# Altium PCB Controller_MainBoard.PcbDoc
Units mil, origin at the board's own origin, x right, y up, seen from the top; angles counter-clockwise.
Board outline 3149.61 x 3149.61 mil, 2 copper layers (Top Layer, Bottom Layer); 391 components, 275 nets, 1158 pads, 0 vias.
Unrouted connection lines stored in the file: 769.
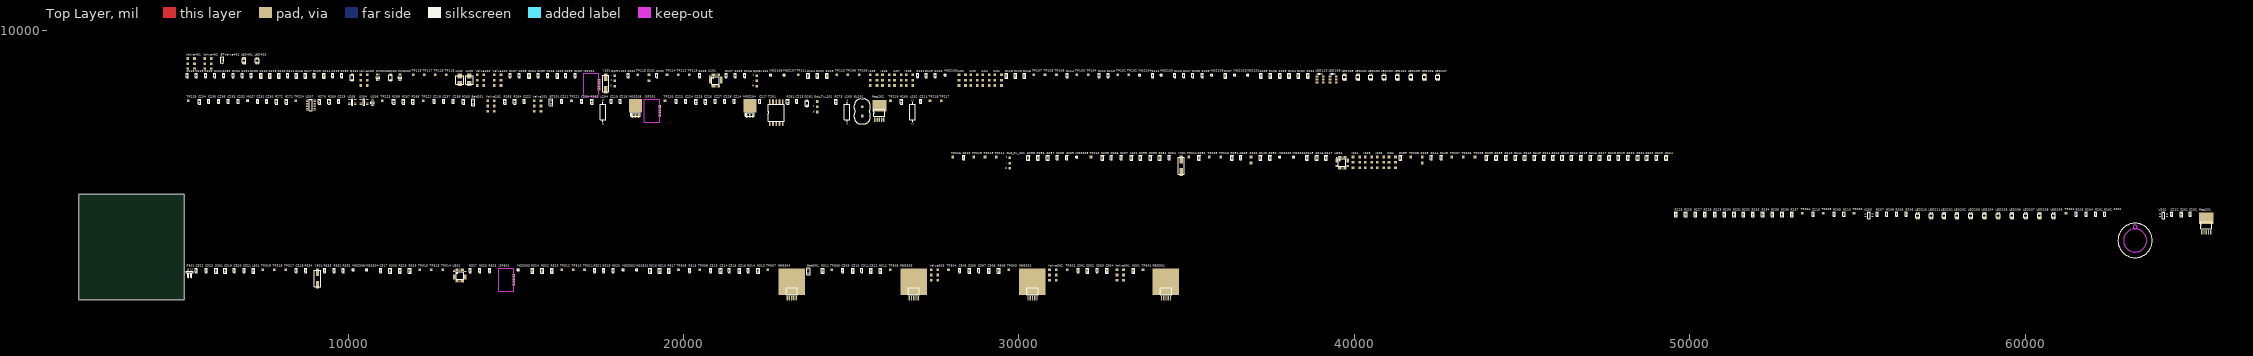
[diagram p0: Top Layer view]
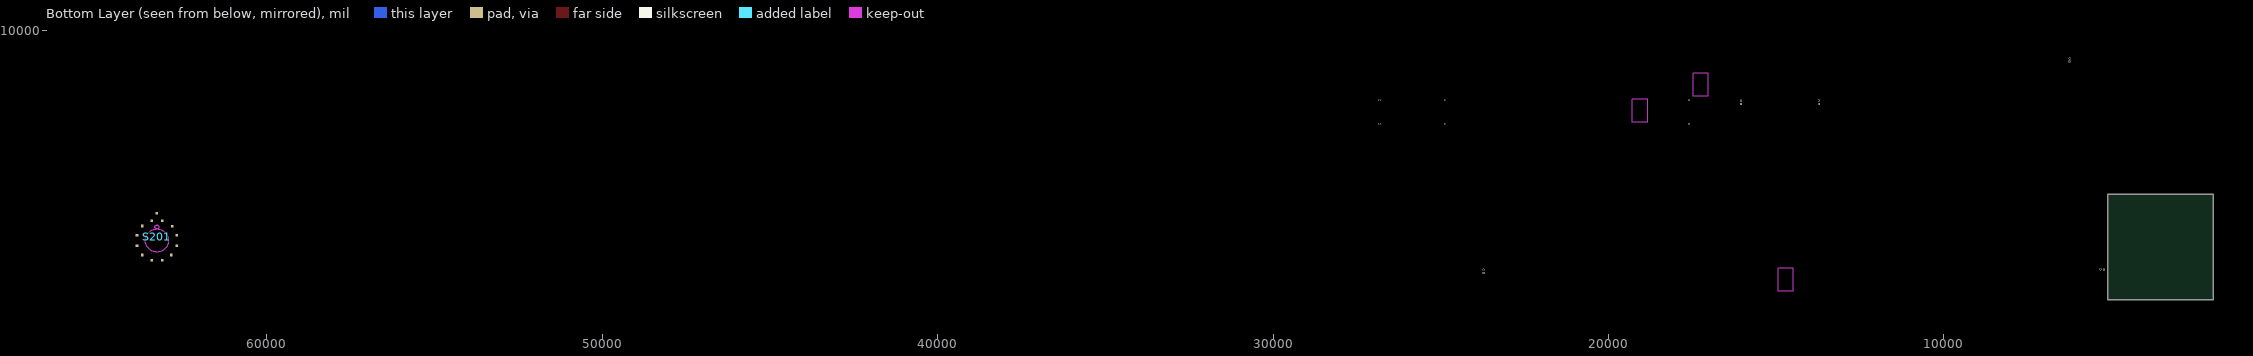
[diagram p1: Bottom Layer view, seen from below]

## Layer stack, top to bottom
Top Layer: signal copper 1.4
Dielectric: dielectric 12.6, FR-4, Dk 4.8
Bottom Layer: signal copper 1.4

## Board outline
1968.5,1968.5 5118.11,1968.5 5118.11,5118.11 1968.5,5118.11

## Design rules (kind name [scope] priority, off if disabled: settings)
Clearance [All] p1: gap=15
PlaneClearance [All] p1: clearance=30
PlaneConnect [All] p1: planeconnectstyle=Relief reliefexpansion=20 reliefentries=4 reliefconductorwidth=15 reliefairgap=15
PolygonConnect [All] p1: connectstyle=Relief reliefconductorwidth=15 reliefentries=4 polygonreliefangle="90 Angle"
RoomDefinition Valve [InComponentClass('Valve')] p1: confinementstyle=ConfineIn formatcopy=TRUE lockcomponents=FALSE outline 5160,8790 7570,8790 7570,9330 5160,9330
RoomDefinition Glasses [InComponentClass('Glasses')] p2: confinementstyle=ConfineIn formatcopy=TRUE lockcomponents=FALSE outline 5170,8020 42760,8020 42760,8850 5170,8850
RoomDefinition Controller [InComponentClass('Controller')] p3: confinementstyle=ConfineIn formatcopy=TRUE lockcomponents=FALSE outline 5170,3090 65640,3090 65640,8080 5170,8080
RoomDefinition Charger [InComponentClass('Charger')] p4: confinementstyle=ConfineIn formatcopy=TRUE lockcomponents=FALSE outline 5170,1930 34800,1930 34800,3040 5170,3040
RoutingCorners [All] p1: cornerstyle=Round minsetback=100 maxsetback=100
RoutingVias [All] p1: holewidth=28 width=50 viastyle="Through Hole" minholewidth=28 minwidth=50 maxholewidth=28 maxwidth=50
SilkscreenOverComponentPads [All] p1: minsilkscreentomaskgap=10
SolderMaskExpansion [All] p1: expansion=15
Width [All] p1: maxlimit=100 minlimit=10 preferedwidth=30
24 further rules are at their usual default settings.

## Classes and differential pairs
component class Charger: Batt301 C301 C302 C303 C304 C305 C306 C307 C308 C309 C310 C311 C312 C313 C314 C315 C316 C317 C318 C319 C320 C321 C322 C323 ISP301 L301 MOS301 MOS302 MOS303 MOS304 MOS305 P301 R301 R306 R311 R312 R313 R314 R315 R316 R317 R318 R319 R320 R321 R322 R323 R324 R325 R326 R327 R328 R329 R330 R331 R332 R333 R334 REG301 REG302 REG303 REG304 S301 TP301 TP302 TP303 TP304 TP305 TP306 TP307 TP308 TP309 TP310 TP311 TP312 TP313 TP314 TP315 TP316 TP317 TP318 U301 Valve301 Valve302 Valve303 Y301
component class Controller: Batt201 BT201 C201 C202 C203 C204 C205 C206 C207 C208 C209 C210 C211 C212 C213 C214 C215 C216 C217 C218 C219 C220 C221 C222 C223 C224 C225 C226 C227 C228 C229 C230 C231 C232 C233 C234 C235 C236 C237 C238 D201 EL201 I201 I202 I203 I204 ISP201 L201 L202 L203 L204 LED201 LED202 LED203 LED204 LED205 LED206 LED207 LED208 LED209 LED210 LED211 MOS201 MOS202 MOS203 MOS204 MOS205 MOS? Opt_Rx_201 Opt_Tx_201 R201 R202 R203 R204 R205 R206 R207 R208 R209 R210 R211 R212 R213 R214 R215 R216 R217 R218 R219 R220 R221 R222 R223 R224 R225 R226 R227 R228 R229 R230 R231 R232 R233 R234 R235 R236 R237 R238 R239 R240 R241 R242 R243 R244 R245 R246 R247 R248 R249 R250 R251 R252 R253 R254 R255 R256 R257 R258 R259 R260 R261 R262 R263 R264 R265 R266 R267 R268 R269 R270 R271 R272 R273 Reg201 Reg202 S201 S202 S203 T201 TP201 TP202 TP203 TP204 TP205 TP206 TP207 TP208 TP209 TP210 TP211 TP212 TP213 TP214 TP215 TP216 TP217 TP218 TP219 TP220 TP221 TP222 TP223 TP224 TP225 U201 U202 U203 U204 U205 U206 U207 Valve201 Valve202 Y201
component class Glasses: C101 C102 C103 C104 C105 C106 C107 C108 C109 C110 C111 C112 C113 C114 C115 C116 C117 C118 C119 C120 C121 D101 D102 I101 I102 I103 I104 I105 I106 I107 I108 ISP101 L101 L102 L103 LED101 LED102 LED103 LED104 LED105 LED106 LED107 LED108 LED109 LED110 MOS101 MOS102 MOS103 MOS104 MOS105 MOS106 MOS107 MOS108 OptRx101 OptTx101 PWR101 PWR102 R101 R102 R103 R104 R105 R106 R107 R108 R109 R110 R111 R112 R113 R114 R115 R116 R117 R118 R119 R120 R121 R122 R123 R124 R125 R126 R127 R128 R129 R130 R131 R132 R133 R134 S101 TP101 TP102 TP103 TP104 TP105 TP106 TP107 TP108 TP109 TP110 TP111 TP112 TP113 TP114 TP115 TP116 TP117 TP118 TP119 U101 Valve101 Valve102 Valve103 Y101
component class Valve: BTValve401 LED401 LED402 Valve401 Valve402

## Components (designator, comment, footprint, x,y, rotation, side; value= is the part's Value field where it differs from the comment)
Batt201 "BaseBankSocket" HDR1X2 13730,7810 r90 top
Batt301 "BaseBankSocket" HDR1X2 23730,2770 r90 top
BT201 "Battery" BAT-2 16050,7860 r90 top
BTValve401 "Battery" BAT-2 6250,9120 r90 top
C101 "18pf" 0603 18360,8660 r90 top
C102 "100nf" 0603 19210,8660 r90 top
C103 "18pf" 0603 16770,8660 r90 top
C104 "10uf" 0805 15400,8650 r90 top
C105 "1uf" 0603 15670,8660 r90 top
C106 "100nf" 0603 15950,8660 r90 top
C107 "100nf" 0603 14830,8660 r90 top
C108 "100nf" 0603 15110,8660 r90 top
C109 "100nf" 0603 16490,8660 r90 top
C110 "10uf" 0805 7940,8650 r90 top
C111 "1uf" 0603 8200,8660 r90 top
C112 "10uf" 0805 7400,8650 r90 top
C113 "10uf" 0805 7670,8650 r90 top
C114 "10uf" 0805 9280,8650 r90 top
C115 "1uf" 0603 9540,8660 r90 top
C116 "10uf" 0805 8460,8650 r90 top
C117 "10uf" 0805 8730,8650 r90 top
C118 "100nf" 0603 5210,8660 r90 top
C119 "2.2nf" 0603 5480,8660 r90 top
C120 "100nf" 0603 5750,8660 r90 top
C121 "2.2nf" 0603 6030,8660 r90 top
C201 "10uf" 0805 64660,4520 r90 top
C202 "1uf" 0603 64920,4530 r90 top
C203 "18pf" 0603 36610,6210 r90 top
C204 "18pf" 0603 34480,6210 r90 top
C205 "10uf" 0805 32490,6200 r90 top
C206 "1uf" 0603 32760,6210 r90 top
C207 "100nf" 0603 33050,6210 r90 top
C208 "100nf" 0603 31140,6210 r90 top
C209 "100nf" 0603 31430,6210 r90 top
C210 "100nf" 0603 28350,6210 r90 top
C211 "Cap Semi" 0603 27070,7890 r90 top
C212 "1uf" 0603 64370,4530 r90 top
C213 "10uf" 0603 23370,7890 r90 top
C214 "100nf" 0603 21520,7890 r90 top
C215 "1uf" 0603 53680,4530 r90 top
C216 "1uf" 0603 18120,7890 r90 top
C217 "1u" 0603 22280,7890 r90 top
C218 "10uf" 0603 12570,7890 r90 top
C219 "10uf" 0603 17840,7890 r90 top
C220 "Cap Semi" 0603 16970,7890 r90 top
C221 "1uf" 0603 16370,7890 r90 top
C222 "100nf" 0603 15250,7890 r90 top
C223 "100nf" 0603 19780,7890 r90 top
C224 "1uf" 0603 20070,7890 r90 top
C225 "10uf" 0805 20370,7880 r90 top
C226 "10uf" 0805 20660,7880 r90 top
C227 "1uf" 0603 20940,7890 r90 top
C228 "100nf" 0603 21230,7890 r90 top
C229 "Cap Semi" 0603 9720,7890 r90 top
C230 "Cap Semi" 0603 7570,7890 r90 top
C231 "Cap Semi" 0603 7300,7890 r90 top
C232 "Cap Semi" 0603 6720,7890 r90 top
C233 "Cap Semi" 0603 6430,7890 r90 top
C234 "10uf" 0805 5570,7880 r90 top
C235 "1uf" 0603 5850,7890 r90 top
C236 "100nf" 0603 6140,7890 r90 top
C237 "1uf" 0603 12850,7890 r90 top
C238 "100nf" 0603 13140,7890 r90 top
C301 "1uf" 0603 31770,2850 r90 top
C302 "10uf" 0805 32050,2840 r90 top
C303 "1uf" 0603 32330,2850 r90 top
C304 "10uf" 0805 32630,2840 r90 top
C305 "1uf" 0603 28230,2850 r90 top
C306 "10uf" 0805 28530,2840 r90 top
C307 "1uf" 0603 28810,2850 r90 top
C308 "10uf" 0805 29110,2840 r90 top
C309 "1uf" 0603 24750,2850 r90 top
C310 "10uf" 0805 25050,2840 r90 top
C311 "1uf" 0603 25320,2850 r90 top
C312 "10uf" 0805 25590,2840 r90 top
C313 "1uf" 0603 20810,2850 r90 top
C314 "10uf" 0805 21110,2840 r90 top
C315 "1uf" 0603 21370,2850 r90 top
C316 "10uf" 0805 21670,2840 r90 top
C317 "18pf" 0603 10970,2850 r90 top
C318 "18pf" 0603 8460,2850 r90 top
C319 "10uf" 0805 6340,2840 r90 top
C320 "1uf" 0603 6610,2850 r90 top
C321 "100nf" 0603 6900,2850 r90 top
C322 "100nf" 0603 5480,2850 r90 top
C323 "100nf" 0603 5770,2850 r90 top
D101 "Diode BYG20D" BYG20J-E3 10120,8520 r90 top
D102 "Diode BYG20D" BYG20J-E3 11270,8520 r90 top
D201 "Diode BYG20D" BYG20J-E3 23680,7750 r90 top
EL201 "EL Connector" "HV connector" 25330,7450 r90 top
I101 "LensesPCB" "Valve male" 29480,8520 r90 top
I102 "PowerSupplyPCB" "Valve male" 28410,8520 r90 top
I103 "PowerSupplyPCB" "Valve male" 28760,8520 r90 top
I104 "PowerSupplyPCB" "Valve male" 29120,8520 r90 top
I105 "LensesPCBA" "Valve male" 25770,8520 r90 top
I106 "PowerSupplyPCBB" "Valve male" 26130,8520 r90 top
I107 "PowerSupplyPCBB" "Valve male" 26490,8520 r90 top
I108 "PowerSupplyPCBB" "Valve male" 26840,8520 r90 top
I201 "HumanIOBoard" "Valve male" 41230,6070 r90 top
I202 "HumanIOBoard" "Valve male" 40880,6070 r90 top
I203 "HumanIOBoardA" "Valve male" 40520,6070 r90 top
I204 "HumanIOBoardA" "Valve male" 40160,6070 r90 top
ISP101 "SATA" SATA 17480,8380 r90 top
ISP201 "SATA" SATA 19290,7610 r90 top
ISP301 "SATA" SATA 14940,2570 r90 top
L101 "10uH" 0805 16240,8650 r90 top
L102 "ELL-6PG4R7N" ELL6PG4R7N-2CHK 13330,8530 r90 top
L103 "ELL-6PG4R7N" ELL6PG4R7N-2CHK 13620,8530 r90 top
L201 "10uH" 0805 33360,6200 r90 top
L202 "Inductor" AXIAL-0.7 26830,7570 r90 top
L203 "Inductor" AXIAL-0.7 24880,7570 r90 top
L204 "Inductor" AXIAL-0.7 17600,7570 r90 top
L301 "10uH" 0805 7180,2840 r90 top
LED101 "Tri LED" CLV1A-FKB 40110,8610 r90 top
LED102 "Tri LED" CLV1A-FKB 40490,8610 r90 top
LED103 "Tri LED" CLV1A-FKB 40890,8610 r90 top
LED104 "Tri LED" CLV1A-FKB 41290,8610 r90 top
LED105 "Tri LED" CLV1A-FKB 41690,8610 r90 top
LED106 "Tri LED" CLV1A-FKB 42090,8610 r90 top
LED107 "Tri LED" CLV1A-FKB 42490,8610 r90 top
LED108 "Tri LED" CLV1A-FKB 39710,8610 r90 top
LED109 "LED_head" "LED Headlamp" 39370,8540 r0 top
LED110 "LED_head" "LED Headlamp" 38980,8540 r0 top
LED201 "Tri LED" CLV1A-FKB 57580,4480 r90 top
LED202 "Tri LED" CLV1A-FKB 57970,4480 r90 top
LED203 "Tri LED" CLV1A-FKB 58380,4480 r90 top
LED204 "Tri LED" CLV1A-FKB 58790,4480 r90 top
LED205 "Tri LED" CLV1A-FKB 59200,4480 r90 top
LED206 "Tri LED" CLV1A-FKB 59610,4480 r90 top
LED207 "Tri LED" CLV1A-FKB 60020,4480 r90 top
LED208 "Tri LED" CLV1A-FKB 60430,4480 r90 top
LED209 "Tri LED" CLV1A-FKB 60850,4480 r90 top
LED210 "Tri LED" CLV1A-FKB 56800,4480 r90 top
LED211 "Tri LED" CLV1A-FKB 57200,4480 r90 top
LED401 "Tri LED" CLV1A-FKB 6900,9100 r90 top
LED402 "Tri LED" CLV1A-FKB 7290,9100 r90 top
MOS101 "EM6K7T2RCT-ND" EM6K7T2R-EMT6 36810,8650 r90 top
MOS102 "EM6K7T2RCT-ND" EM6K7T2R-EMT6 36410,8650 r90 top
MOS103 "EM6K7T2RCT-ND" EM6K7T2R-EMT6 34230,8650 r90 top
MOS104 "EM6K7T2RCT-ND" EM6K7T2R-EMT6 33580,8650 r90 top
MOS105 "EM6K7T2RCT-ND" EM6K7T2R-EMT6 27780,8650 r90 top
MOS106 "EM6K7T2RCT-ND" EM6K7T2R-EMT6 22580,8650 r90 top
MOS107 "EM6K7T2RCT-ND" EM6K7T2R-EMT6 22980,8650 r90 top
MOS108 "EM6K7T2RCT-ND" EM6K7T2R-EMT6 35730,8650 r90 top
MOS201 "EM6K7T2RCT-ND" EM6K7T2R-EMT6 38170,6200 r90 top
MOS202 "EM6K7T2RCT-ND" EM6K7T2R-EMT6 37760,6200 r90 top
MOS203 "EM6K7T2RCT-ND" EM6K7T2R-EMT6 31710,6200 r90 top
MOS204 "STD5NK52ZD" DPAK 21890,7460 r90 top
MOS205 "STD5NK52ZD" DPAK 18480,7460 r90 top
MOS301 "EM6K7T2RCT-ND" EM6K7T2R-EMT6 18590,2840 r90 top
MOS302 "EM6K7T2RCT-ND" EM6K7T2R-EMT6 18180,2840 r90 top
MOS303 "EM6K7T2RCT-ND" EM6K7T2R-EMT6 15060,2840 r90 top
MOS304 "EM6K7T2RCT-ND" EM6K7T2R-EMT6 10540,2840 r90 top
MOS305 "EM6K7T2RCT-ND" EM6K7T2R-EMT6 10130,2840 r90 top
MOS? "EM6K7T2RCT-ND" EM6K7T2R-EMT6 6990,7880 r90 top
Opt_Rx_201 "TORX177" "Optical RX" 29730,5890 r90 top
Opt_Tx_201 "LTDL-TX12P03" "Optical TX" 23990,7570 r90 top
OptRx101 "TORX177" "Optical RX" 22180,8340 r90 top
OptTx101 "LTDL-TX12P03" "Optical TX" 17950,8340 r90 top
P301 "Power in" HDR1X2H 5230,2880 r0 top
PWR101 "TPS61085PWR" TPS61085-MSOP8 10850,8520 r90 top
PWR102 "TPS61085PWR" TPS61085-MSOP8 11510,8520 r90 top
R101 "Res3" 0805 38620,8650 r90 top
R102 "Res3" 0805 38340,8650 r90 top
R103 "Res3" 0805 37780,8650 r90 top
R104 "Res3" 0805 38060,8650 r90 top
R105 "Res3" 0805 37220,8650 r90 top
R106 "Res3" 0805 37500,8650 r90 top
R107 "Res3" 0805 36160,8650 r90 top
R108 "10k" 0603 35190,8660 r90 top
R109 "10k" 0603 35470,8660 r90 top
R110 "10k" 0603 34650,8660 r90 top
R111 "10k" 0603 33990,8660 r90 top
R112 "10k" 0603 32390,8660 r90 top
R113 "10k" 0603 32660,8660 r90 top
R114 "10k" 0603 31440,8660 r90 top
R115 "Res3" 0805 29900,8650 r90 top
R116 "Res3" 0805 30170,8650 r90 top
R117 "10k" 0603 34920,8660 r90 top
R118 "Res3" 0805 29630,8650 r90 top
R119 "10k" 0603 27240,8660 r90 top
R120 "10k" 0603 27510,8660 r90 top
R121 "10k" 0603 26980,8660 r90 top
R122 "Res3" 0805 24000,8650 r90 top
R123 "Res3" 0805 24280,8650 r90 top
R124 "Res3" 0805 23720,8650 r90 top
R125 "10k" 0603 21550,8660 r90 top
R126 "10k" 0603 21830,8660 r90 top
R127 "10k" 0603 21270,8660 r90 top
R128 "10k" 0603 20480,8660 r90 top
R129 "54.9k" 0603 8990,8660 r90 top
R130 "54.9k" 0603 9810,8660 r90 top
R131 "22K" 0603 6850,8660 r90 top
R132 "18K" 0603 6290,8660 r90 top
R133 "22k" 0603 7110,8660 r90 top
R134 "18k" 0603 6570,8660 r90 top
R201 "10k" 0603 62110,4530 r90 top
R202 "10k" 0603 62380,4530 r90 top
R203 "10k" 0603 61530,4530 r90 top
R204 "10k" 0603 61820,4530 r90 top
R205 "10k" 0603 56170,4530 r90 top
R206 "10k" 0603 56460,4530 r90 top
R207 "10k" 0603 55590,4530 r90 top
R208 "10k" 0603 55880,4530 r90 top
R209 "10k" 0603 54310,4530 r90 top
R210 "10k" 0603 54600,4530 r90 top
R211 "Res1" 0805 45660,6200 r90 top
R212 "Res1" 0805 45920,6200 r90 top
R213 "Res1" 0805 46200,6200 r90 top
R214 "Res1" 0805 46480,6200 r90 top
R215 "Res1" 0805 46760,6200 r90 top
R216 "Res1" 0805 47040,6200 r90 top
R217 "Res1" 0805 47320,6200 r90 top
R218 "Res1" 0805 47600,6200 r90 top
R219 "Res1" 0805 47880,6200 r90 top
R220 "Res1" 0805 48160,6200 r90 top
R221 "Res1" 0805 48450,6200 r90 top
R222 "Res1" 0805 48720,6200 r90 top
R223 "Res1" 0805 49010,6200 r90 top
R224 "Res1" 0805 49300,6200 r90 top
R225 "Res1" 0805 49590,4520 r90 top
R226 "Res1" 0805 49880,4520 r90 top
R227 "Res1" 0805 50170,4520 r90 top
R228 "Res1" 0805 50460,4520 r90 top
R229 "Res1" 0805 50750,4520 r90 top
R230 "Res1" 0805 51040,4520 r90 top
R231 "Res1" 0805 51330,4520 r90 top
R232 "Res1" 0805 51600,4520 r90 top
R233 "Res1" 0805 51890,4520 r90 top
R234 "Res1" 0805 52180,4520 r90 top
R235 "Res1" 0805 52470,4520 r90 top
R236 "Res1" 0805 52760,4520 r90 top
R237 "Res1" 0805 53050,4520 r90 top
R238 "Res1" 0805 43940,6200 r90 top
R239 "Res1" 0805 44230,6200 r90 top
R240 "Res1" 0805 44520,6200 r90 top
R241 "Res1" 0805 44810,6200 r90 top
R242 "Res1" 0805 45080,6200 r90 top
R243 "Res1" 0805 45370,6200 r90 top
R244 "10k" 0603 42300,6210 r90 top
R245 "10k" 0603 42590,6210 r90 top
R246 "Res3" 0805 38880,6200 r90 top
R247 "Res3" 0805 39160,6200 r90 top
R248 "Res3" 0805 38590,6200 r90 top
R249 "Res3" 0805 37200,6200 r90 top
R250 "Res3" 0805 37490,6200 r90 top
R251 "Res3" 0805 36350,6200 r90 top
R252 "Res1" 0805 35370,6200 r90 top
R253 "Res3" 0805 33920,6200 r90 top
R254 "Res3" 0805 34200,6200 r90 top
R255 "Res3" 0805 33630,6200 r90 top
R256 "Res3" 0805 30570,6200 r90 top
R257 "Res3" 0805 30860,6200 r90 top
R258 "Res3" 0805 30280,6200 r90 top
R259 "Res1" 0805 41380,6200 r90 top
R260 "4R5" 0805 26500,7880 r90 top
R261 "Res3" 0805 23110,7880 r90 top
R262 "4R5" 0805 17270,7880 r90 top
R263 "Res3" 0805 14680,7880 r90 top
R264 "Res3" 0805 14970,7880 r90 top
R265 "Res3" 0805 13440,7880 r90 top
R266 "Res3" 0805 11940,7880 r90 top
R267 "Res3" 0805 11650,7880 r90 top
R268 "Res3" 0805 11360,7880 r90 top
R269 "Res3" 0805 9440,7880 r90 top
R270 "Res3" 0805 9150,7880 r90 top
R271 "Res3" 0805 8160,7880 r90 top
R272 "Res3" 0805 7870,7880 r90 top
R273 "4R5" 0805 24550,7880 r90 top
R301 "3R" 0805 33420,2840 r90 top
R306 "3R" 0805 29400,2840 r90 top
R311 "Res3" 0805 24150,2840 r90 top
R312 "3R" 0805 25870,2840 r90 top
R313 "Res3" 0805 22230,2840 r90 top
R314 "?" 0603 21930,2850 r90 top
R315 "3k3" 0603 20180,2850 r90 top
R316 "Res3" 0805 19290,2840 r90 top
R317 "Res3" 0805 19570,2840 r90 top
R318 "Res3" 0805 19010,2840 r90 top
R319 "10k" 0603 17620,2850 r90 top
R320 "10k" 0603 17900,2850 r90 top
R321 "10k" 0603 17350,2850 r90 top
R322 "Res3" 0805 15790,2840 r90 top
R323 "Res3" 0805 16080,2840 r90 top
R324 "Res3" 0805 15500,2840 r90 top
R325 "10k" 0603 13930,2850 r90 top
R326 "10k" 0603 14220,2850 r90 top
R327 "10k" 0603 13640,2850 r90 top
R328 "Res3" 0805 11550,2840 r90 top
R329 "Res3" 0805 11840,2840 r90 top
R330 "Res3" 0805 11260,2840 r90 top
R331 "10k" 0603 9590,2850 r90 top
R332 "10k" 0603 9860,2850 r90 top
R333 "10k" 0603 9300,2850 r90 top
R334 "10k" 0603 8740,2850 r90 top
Reg201 "Reg104-5" REG104-5-DDPAK5 65400,4190 r90 top
Reg202 "Reg104-5" REG104-5-DDPAK5 25840,7550 r90 top
REG301 "TPS7A4501DCQR" TPS7A4501KTTR-5DDPAK 34250,2020 r90 top
REG302 "TPS7A4501DCQR" TPS7A4501KTTR-5DDPAK 30270,2020 r90 top
REG303 "TPS7A4501DCQR" TPS7A4501KTTR-5DDPAK 26730,2020 r90 top
REG304 "TPS7A4501KTTR" TPS7A4501KTTR-5DDPAK 23090,2020 r90 top
S101 "SW-PB" "2 pin switch (surface mount)" 18970,8500 r90 top
S201 "SW-12WAY" "12 pole switch" 63280,3740 r0 top
S202 "SW-KEY" "2 pin switch (surface mount)" 36920,6050 r90 top
S203 "SW-SPST" "2 pin switch (surface mount)" 42030,6050 r90 top
S301 "SW-PB" 0805 6070,2840 r90 top
T201 "SI3210 SMD Transformer" "SI3210 SMD Transformer" 22570,7230 r90 top
TP101 "TestPoint" TestPoint 32950,8680 r90 top
TP102 "TestPoint" TestPoint 33270,8680 r90 top
TP103 "TestPoint" TestPoint 31730,8680 r90 top
TP104 "TestPoint" TestPoint 32070,8680 r90 top
TP105 "TestPoint" TestPoint 30780,8680 r90 top
TP106 "TestPoint" TestPoint 31120,8680 r90 top
TP107 "TestPoint" TestPoint 30440,8680 r90 top
TP108 "TestPoint" TestPoint 24900,8680 r90 top
TP109 "TestPoint" TestPoint 25240,8680 r90 top
TP110 "TestPoint" TestPoint 24570,8680 r90 top
TP111 "TestPoint" TestPoint 23420,8680 r90 top
TP112 "TestPoint" TestPoint 19840,8680 r90 top
TP113 "TestPoint" TestPoint 20170,8680 r90 top
TP114 "TestPoint" TestPoint 19510,8680 r90 top
TP115 "TestPoint" TestPoint 18640,8680 r90 top
TP116 "TestPoint" TestPoint 12930,8680 r90 top
TP117 "TestPoint" TestPoint 12270,8680 r90 top
TP118 "TestPoint" TestPoint 12600,8680 r90 top
TP119 "TestPoint" TestPoint 11940,8680 r90 top
TP201 "TestPoint" TestPoint 61220,4550 r90 top
TP202 "TestPoint" TestPoint 54900,4550 r90 top
TP203 "TestPoint" TestPoint 53980,4550 r90 top
TP204 "TestPoint" TestPoint 53350,4550 r90 top
TP205 "TestPoint" TestPoint 43600,6230 r90 top
TP206 "TestPoint" TestPoint 43250,6230 r90 top
TP207 "TestPoint" TestPoint 42900,6230 r90 top
TP208 "TestPoint" TestPoint 41680,6230 r90 top
TP209 "TestPoint" TestPoint 35670,6230 r90 top
TP210 "TestPoint" TestPoint 36020,6230 r90 top
TP211 "TestPoint" TestPoint 35060,6230 r90 top
TP212 "TestPoint" TestPoint 32150,6230 r90 top
TP213 "TestPoint" TestPoint 28990,6230 r90 top
TP214 "TestPoint" TestPoint 29330,6230 r90 top
TP215 "TestPoint" TestPoint 28650,6230 r90 top
TP216 "TestPoint" TestPoint 28030,6230 r90 top
TP217 "TestPoint" TestPoint 27690,7910 r90 top
TP218 "TestPoint" TestPoint 27350,7910 r90 top
TP219 "TestPoint" TestPoint 26170,7910 r90 top
TP220 "TestPoint" TestPoint 19450,7910 r90 top
TP221 "TestPoint" TestPoint 16660,7910 r90 top
TP222 "TestPoint" TestPoint 12240,7910 r90 top
TP223 "TestPoint" TestPoint 11020,7910 r90 top
TP224 "TestPoint" TestPoint 8440,7910 r90 top
TP225 "TestPoint" TestPoint 5230,7910 r90 top
TP301 "TestPoint" TestPoint 33700,2870 r90 top
TP302 "TestPoint" TestPoint 31440,2870 r90 top
TP303 "TestPoint" TestPoint 29700,2870 r90 top
TP304 "TestPoint" TestPoint 27900,2870 r90 top
TP305 "TestPoint" TestPoint 26160,2870 r90 top
TP306 "TestPoint" TestPoint 24420,2870 r90 top
TP307 "TestPoint" TestPoint 22510,2870 r90 top
TP308 "TestPoint" TestPoint 20480,2870 r90 top
TP309 "TestPoint" TestPoint 19850,2870 r90 top
TP310 "TestPoint" TestPoint 16710,2870 r90 top
TP311 "TestPoint" TestPoint 17050,2870 r90 top
TP312 "TestPoint" TestPoint 16370,2870 r90 top
TP313 "TestPoint" TestPoint 12480,2870 r90 top
TP314 "TestPoint" TestPoint 12820,2870 r90 top
TP315 "TestPoint" TestPoint 12140,2870 r90 top
TP316 "TestPoint" TestPoint 7800,2870 r90 top
TP317 "TestPoint" TestPoint 8140,2870 r90 top
TP318 "TestPoint" TestPoint 7460,2870 r90 top
U101 "ATmega8L-8AI" 32A_M 20960,8510 r0 top
U201 "ATmega8L-8AI" 32A_M 39640,6060 r0 top
U202 "FSAL200" FSAL200-16QSOP 64020,4580 r0 top
U203 "FSAL200" FSAL200-16QSOP 55240,4580 r0 top
U204 "NE555" NE555 10380,7940 r0 top
U205 "NE555" NE555 10030,7940 r0 top
U206 "MCP1630v" "MCP1630V-E/MS 8MSOP" 10690,7760 r90 top
U207 "74AC04SC" "74AC04SC 14-SOIC" 8780,7930 r0 top
U301 "ATmega8L-8AI" 32A_M 13330,2700 r0 top
Valve101 "6 + SHIELD DIN" "Valve male" 14560,8520 r90 top
Valve102 "6 + SHIELD DIN" "Valve male" 14050,8520 r90 top
Valve103 "6+SHIELD DIN" "Valve male" 10570,8520 r90 top
Valve201 "6+SHIELD DIN" "Valve male" 15750,7750 r90 top
Valve202 "6+SHIELD DIN" "Valve male" 14360,7750 r90 top
Valve301 "6+SHIELD DIN" "Valve male" 33120,2710 r90 top
Valve302 "6+SHIELD DIN" "Valve male" 31110,2710 r90 top
Valve303 "6+SHIELD DIN" "Valve male" 27580,2710 r90 top
Valve401 "6+SHIELD DIN SKT" "Valve male" 5420,9010 r90 top
Valve402 "6+SHIELD DIN SKT" "Valve male" 5920,9010 r90 top
Y101 "XTAL" ABLS-16MHz-B4-T 17680,8420 r90 top
Y201 "XTAL" ABLS-16MHz-B4-T 34840,5970 r90 top
Y301 "XTAL" ABLS-16MHz-B4-T 9090,2610 r90 top

## Footprints (in the part's own frame and the unit in brackets; to place one, negate y for a bottom-side part, rotate by r counter-clockwise, add the part's x,y. Pads: shape width x height; smd on the part's side, far side on the other; paste and mask are expansions set on the pad)
"2 pin switch (surface mount)" [mm]
  rect 2x2 smd: 1(0,0) 2(4.6,0)
"12 pole switch" [mm] "rotary switch"
  rect 2x2 smd far side: 1(-4,15) 2(-11.6,10.8) 3(-15,4) 5(-15,-4) 6(-11,-11) 7(-4,-15) 8(4,-15) 9(11,-11) 10(15,-4) 11(15,4) 12(11,11) 13(4,15) 14(0,20.6)
  Keep-Out Layer circle w0.254: c0,0 r8.75
  Keep-Out Layer circle w0.254: c0,10.25 r1.5
  silkscreen extent -13,-13 13,13
32A_M [mm] "Thin QFP, 32-Leads, Body 7x7mm, Pitch 0.8mm, IPC Low Density"
  oval 1.95x0.6 smd: 1(-4.25,2.8) 2(-4.25,2) 3(-4.25,1.2) 4(-4.25,0.4) 5(-4.25,-0.4) 6(-4.25,-1.2) 7(-4.25,-2) 8(-4.25,-2.8) 17(4.25,-2.8) 18(4.25,-2) 19(4.25,-1.2) 20(4.25,-0.4) 21(4.25,0.4) 22(4.25,1.2) 23(4.25,2) 24(4.25,2.8)
  oval 0.6x1.95 smd: 9(-2.8,-4.25) 10(-2,-4.25) 11(-1.2,-4.25) 12(-0.4,-4.25) 13(0.4,-4.25) 14(1.2,-4.25) 15(2,-4.25) 16(2.8,-4.25) 25(2.8,4.25) 26(2,4.25) 27(1.2,4.25) 28(0.4,4.25) 29(-0.4,4.25) 30(-1.2,4.25) 31(-2,4.25) 32(-2.8,4.25)
  silkscreen extent -4.37,-2.85 2.85,3.77, body extent -3.5,-3.5 3.5,3.5, height 1.2
"74AC04SC 14-SOIC" [mm]
  rect 1.7x0.75 smd: 1(0,0)
  oval 1.7x0.75 smd: 2(0,-1.27) 3(0,-2.54) 4(0,-3.81) 5(0,-5.08) 6(0,-6.35) 7(0,-7.62) 8(5.7,-7.62) 9(5.7,-6.35) 10(5.7,-5.08) 11(5.7,-3.81) 12(5.7,-2.54) 13(5.7,-1.27) 14(5.7,0)
  silkscreen extent 1.68,-8.25 4.02,0.64
0603 [mm] "generic 0603 Cap/Res"
  rect 1.1x1 smd: 1(-0.85,0) 2(0.85,0)
  silkscreen extent -1.65,-0.76 1.65,0.76
0805 [mm] "generic 0805 Cap/Res"
  rect 1.3x1.5 smd: 1(-0.95,0) 2(0.95,0)
  silkscreen extent -1.91,-1.02 1.91,1.02
ABLS-16MHz-B4-T [mm] "Abracon ABLS Series 16MHz 18pF Crystal"
  rect 5.8x2.5 smd: 1(-4.75,0) 2(4.75,0)
  silkscreen extent -6.35,-2.35 6.35,2.35
AXIAL-0.7 [mm] "Axial Device, Thru-Hole; 2 Leads; 0.7 in Pin Spacing"
  round 1.4 hole 0.85: 1(-8.89,0) 2(8.89,0)
  silkscreen extent -7.62,-2.03 7.62,2.03
BAT-2 [mm] "Multicell Battery; 2 Leads"
  rect 1.5x1.5 hole 0.9: 1(-1.27,0)
  round 1.5 hole 0.9: 2(1.27,0)
  silkscreen extent -2.54,-1.27 2.54,1.27
BYG20J-E3 [mm]
  rrect50% 2x2 smd: 1(0,0)
  rect 2x2 smd: 2(4,0)
  silkscreen extent -0.04,-1.25 4,1.6
CLV1A-FKB [mm] "Cree RGB SMD LED"
  rrect50% 2x1.3 smd: 1(-1.75,0.75)
  rect 2x1.3 smd: 2(-1.75,-0.75) 3(1.75,-0.75) 4(1.75,0.75)
  silkscreen extent -1.6,-1.4 1.6,1.4
DPAK [mm]
  rect 3.2x1.2 smd: 1(0,0)
  rect 10x10 smd: 1(7.5,-2.28)
  oval 3.2x1.2 smd: 2(0,-2.28) 3(0,-4.56)
  silkscreen extent -0.43,-5.7 2.43,1.14
ELL6PG4R7N-2CHK [mm] "Panasonic ELL-6UH100M Inductor 10uH"
  rect 3.8x3.4 smd: 1(-2.85,0) 2(2.85,0)
  silkscreen extent -3.2,-3 3.2,3
EM6K7T2R-EMT6 [mm] "Rohm Dual Channel NMOS"
  rect 0.8x0.25 smd: 1(0,0)
  oval 0.8x0.25 smd: 2(0,-0.5) 3(0,-1) 4(1.4,-1) 5(1.4,-0.5) 6(1.4,0)
  silkscreen extent 0.12,-1.25 1.28,0.25
FSAL200-16QSOP [mm]
  rect 1.7x0.317 smd: 1(0,0)
  oval 1.7x0.317 smd: 2(0,-0.635) 3(0,-1.27) 4(0,-1.905) 5(0,-2.54) 6(0,-3.175) 7(0,-3.81) 8(0,-4.445) 9(5.4,-4.445) 10(5.4,-3.81) 11(5.4,-3.175) 12(5.4,-2.54) 13(5.4,-1.905) 14(5.4,-1.27) 15(5.4,-0.635) 16(5.4,0)
  silkscreen extent 1.73,-4.76 3.67,0.32
HDR1X2 [mm] "Connector; Header; 2 Position"
  rect 1.5x1.5 hole 0.9: 1(0,0)
  round 1.5 hole 0.9: 2(2.54,0)
  silkscreen extent -1.27,-1.27 3.81,1.27
HDR1X2H [mm] "Connector; Header; 2 Position; Right Angle"
  rect 1.5x1.5 hole 0.9: 1(0,0)
  round 1.5 hole 0.9: 2(2.54,0)
  silkscreen extent -1.27,-6.35 3.81,-1.27
"HV connector" [mm]
  rect 2x2 smd: 1(0,0) 2(7,0)
  silkscreen extent -6,-6 13,6
"LED Headlamp" [mm]
  rect 2x1.5 smd: 1(-2.35,-2.1) 1(-2.35,0) 1(-2.35,2.1) 2(2.35,-2.1) 2(2.35,0) 2(2.35,2.1)
  silkscreen extent -2.67,3.68 1.65,4.83
"MCP1630V-E/MS 8MSOP" [mm]
  rect 0.8x0.4 smd: 1(0,0)
  oval 0.8x0.4 smd: 2(0,-0.65) 3(0,-1.3) 4(0,-1.95) 5(4.3,-1.95) 6(4.3,-1.3) 7(4.3,-0.65) 8(4.3,0)
  silkscreen extent 1.29,-2.28 3.01,0.33
NE555 [mm]
  rect 2x0.55 smd: 1(0,0)
  oval 2x0.55 smd: 2(0,-1.27) 3(0,-2.54) 4(0,-3.81) 5(4.8,-3.81) 6(4.8,-2.54) 7(4.8,-1.27) 8(4.8,0)
  silkscreen extent 1.84,-4.44 2.97,0.64
"Optical RX" [mm]
  rect 2x2 smd: 1(0,0) 2(4,0) 3(8,0)
"Optical TX" [mm]
  rect 2x2 smd: 1(0,0) 2(4,0) 3(8,0)
REG104-5-DDPAK5 [mm]
  rect 3.4x1 smd: 1(-5.3,3.4)
  oval 3.4x1 smd: 2(-5.3,1.7) 3(-5.3,0) 4(-5.3,-1.7) 5(-5.3,-3.4)
  rect 8.6x10.7 smd: 6(5.3,0)
  silkscreen extent -2.72,-4.25 2.72,4.25
SATA [mm]
  round 0 hole 1.524 unplated: 0(-6.375,2.362) 0(6.375,2.362)
  rect 0.9x2 smd: 1(3.81,0) 2(2.54,0) 3(1.27,0) 4(0,0) 5(-1.27,0) 6(-2.54,0) 7(-3.81,0)
  Keep-Out Layer lines w0.254: -8.8,11.5 -8.8,0.1 ; -8.75,11.5 8.75,11.5 ; 8.8,11.5 8.8,0.1 ; -8.75,0.1 8.75,0.1
"SI3210 SMD Transformer" [mm]
  oval 4x1.2 smd: 0(0,-2.48) 0(0,-4.96) 0(0,-7.44) 2(0,-9.92) 3(16.36,0) 4(16.36,-2.48) 5(16.36,-4.96) 6(16.36,-7.44) 7(16.36,-9.92)
  rect 4x1.2 smd: 1(0,0)
  silkscreen extent 1.84,-11.16 14.53,1.24
TestPoint [mm]
  rect 2x2 smd: 1(0,0)
TPS7A4501KTTR-5DDPAK [mm]
  rect 3.4x1 smd: 1(0,0)
  oval 3.4x1 smd: 2(0,-1.7) 3(0,-3.4) 4(0,-5.1) 5(0,-6.8)
  rect 20x20 smd: 6(12.6,-3.4)
  silkscreen extent 2.53,-7.65 8.07,0.85
TPS61085-MSOP8 [mm] "Ti Step-Up DCDC Converter - MSOP 8 Pin Package"
  rect 1.4x0.38 smd: 1(0,0)
  oval 1.4x0.38 smd: 2(0,-0.65) 3(0,-1.3) 4(0,-1.95) 5(4.35,-1.95) 6(4.35,-1.3) 7(4.35,-0.65) 8(4.35,0)
  silkscreen extent 1.58,-2.28 2.77,0.33
"Valve male" [mm]
  rect 2x2 smd: 1(-4,5) 2(-4,0) 3(0,5) 4(0,0) 5(4,5) 6(4,0)

## Part data
Batt201 Batt301 EL201: library part "Header 2", "Header, 2-Pin"
BT201 BTValve401: "Multicell Battery"
C101 C102 C103 C104 C105 C106 C107 C108 C109 C110 C111 C112 C113 C114 C115 C116 C117 C118 C119 C120 C121 C201 C202 C203 C204 C205 C206 C207 C208 C209 C210 C212 C213 C214 C215 C216 C217 C218 C219 C221 C222 C223 C224 C225 C226 C227 C228 C234 C235 C236 C237 C238 C301 C302 C303 C304 C305 C306 C307 C308 C309 C310 C311 C312 C313 C314 C315 C316 C317 C318 C319 C320 C321 C322 C323: library part "Cap Semi", "Capacitor (Semiconductor SIM Model)"
C211 C220 C229 C230 C231 C232 C233: "Capacitor (Semiconductor SIM Model)"
D101 D102 D201: library part "Diode 10TQ035", "Schottky Rectifier"
I101 I102 I103 I104 I105 I106 I107 I108 I201 I202 I203 I204 Valve101 Valve102 Valve103 Valve201 Valve202 Valve301 Valve302 Valve303 Valve401 Valve402: library part "Header 3X2A", "Header, 3-Pin, Dual row"
ISP101 ISP201 ISP301: library part "Header 3X2", "Header, 3-Pin, Dual row"
L101 L102 L103 L201 L301: library part Inductor, "Inductor"
LED109 LED110: library part LED0, "Typical INFRARED GaAs LED"
MOS204 MOS205: library part MOSFET-N, "N-Channel MOSFET"
Opt_Rx_201 OptRx101: "Optical receiver module"
Opt_Tx_201 OptTx101: "Optical transmitter"
P301: library part "Header 2H", "Header, 2-Pin, Right Angle"
R101 R102 R103 R104 R105 R106 R107 R115 R116 R118 R122 R123 R124 R211 R212 R213 R214 R215 R216 R217 R218 R219 R220 R221 R222 R223 R224 R225 R226 R227 R228 R229 R230 R231 R232 R233 R234 R235 R236 R237 R238 R239 R240 R241 R242 R243 R246 R247 R248 R249 R250 R251 R252 R253 R254 R255 R256 R257 R258 R259 R261 R263 R264 R265 R266 R267 R268 R269 R270 R271 R272 R311 R313 R316 R317 R318 R322 R323 R324 R328 R329 R330: "Resistor"
R108 R109 R110 R111 R112 R113 R114 R117 R119 R120 R121 R125 R126 R127 R128 R201 R202 R203 R204 R205 R206 R207 R208 R209 R210 R244 R245 R260 R262 R273 R315 R319 R320 R321 R325 R326 R327 R331 R332 R333 R334: library part Res3, "Resistor"
R129 R130 R131 R132 R133 R134 R301 R306 R312 R314: library part Res1, "Resistor"
REG301 REG302 REG303: library part TPS7A4515
REG304: library part TPS7A4501
S101 S301: "Switch"
S201: "12 Way Switch"
S202: library part SW-SPST, "Single-Pole, Single-Throw Switch"
S203: "Single-Pole, Single-Throw Switch"
U101 U201 U301: "8-Bit AVR Microcontroller with 8K Bytes of In-System Programmable Flash Memory"
U202 U203: "ST Quad Bi-Directional Logic Switch"
U207: library part SN54HC04J, "Hex Inverter"
Y101 Y201 Y301: "Crystal Oscillator"

## Nets (pads, with @x,y where several pads share a name; then routed paths per layer and width w, separated by ;. In a path a pad name is that pad's centre, name@x,y a point inside that pad or via, vN(x,y) a via of type N, cw(c..) or ccw(c..) an arc to the next point about the centre after c; other vN are vias at no path point)
555OSC_201: R269.1 TP224.1 U204.3 U207.1
ACOSC_201: R262.2 R270.1 TP219.1 U205.3
B_CONTROL_101: LED101.1 LED102.1 LED103.1 LED104.1 LED105.1 LED106.1 LED107.1 LED108.1 R104.1
B_PWM_101: I101.3 U101.2
B_PWM_101A: I105.3 MOS101.5 R109.2 TP102.1
BATT+301: Batt301.1 C315.2 C316.2 R311.2 R314.1 REG304.4 TP307.1
BATTEN301: REG304.1 TP309.1 U301.26
BATTERY_SENSE_201: Batt201.1 BT201.1 C223.2 C224.2 C225.2 I202.3 Reg202.1 Reg202.5 TP221.1 U201.19
BATTERYSENSE_101: I102.1 U101.19
BATTERYSENSE_101B: I106.1
BATTSENSE301: R311.1 R313.2 TP308.1 U301.22
COLOUR_EN_201: I202.4 U201.14
COLOUR_EN_201A: I204.4 Reg201.5 TP202.1
DATA201: I202.6 U201.25
DATA201A: I204.6 TP204.1 U203.4
DATA202: I201.2 U201.26
DATA202A: I203.2 TP206.1 U203.7
DATA203: I201.4 U201.27
DATA203A: I203.4 TP207.1 U203.9
DATA204: I201.5 U201.28
DATA204A: TP208.1 U203.12
DATA_SELECT_201: I202.1 U201.23
DATA_SELECT_201A: I204.1 TP201.1 U202.1
DATA_SELECT_202: I202.5 U201.24
DATA_SELECT_202A: I204.5 TP203.1 U203.1
EL_CONTROL_201: MOS?.2 TP225.1 U201.13
G_CONTROL_101: LED101.2 LED102.2 LED103.2 LED104.2 LED105.2 LED106.2 LED107.2 LED108.2 R103.1
G_PWM_101: I101.2 U101.1
G_PWM_101A: I105.2 MOS101.2 R108.2 TP101.1
GND101: C101.1 C102.1 C103.1 C104.1 C105.1 C106.1 C107.1 C108.1 C109.1 I101.5 I102.5 ISP101.6 MOS103.3 MOS103.6 MOS104.3 MOS104.6 MOS105.3 MOS105.6 MOS106.3 MOS106.6 MOS107.3 OptRx101.2 OptTx101.3 R112.1 R113.1 R114.1 R119.1 R120.1 R121.1 R125.1 R126.1 R127.1 S101.2 U101.3 U101.5 U101.21
GND101A: I105.5 MOS101.3 MOS101.6 MOS102.3 MOS102.6 MOS108.3 R108.1 R109.1 R110.1 R111.1 R117.2
GND101B: C110.1 C111.1 C112.1 C113.1 C114.1 C115.1 C116.1 C117.1 C118.1 C119.1 C120.1 C121.1 I106.5 PWR101.4 PWR102.4 R132.1 R134.1 Valve103.2
GND201: Batt201.2 BT201.2 C203.1 C204.1 C205.1 C206.1 C207.1 C208.1 C209.1 C210.1 C213.1 C214.1 C216.1 C218.2 C219.2 C220.1 C221.2 C222.2 C223.1 C224.1 C225.1 C226.1 C227.1 C228.1 C230.1 C231.1 C232.1 C233.1 C234.2 C235.2 C236.2 C237.2 C238.2 I201.3 ISP201.6 MOS201.3 MOS201.6 MOS202.3 MOS202.6 MOS203.3 MOS203.6 MOS205.3 MOS?.3 Opt_Rx_201.2 Opt_Tx_201.3 R249.1 R250.1 R251.1 R252.2 R256.1 R257.1 R258.1 R261.2 R263.1 R265.2 Reg202.3 T201.6 U201.3 U201.5 U201.21 U204.1 U205.1 U206.5 U207.7
GND201A: C201.1 C202.1 C212.2 C215.1 I203.3 I203.5 R201.2 R202.1 R203.2 R204.1 R205.2 R206.1 R207.2 R208.1 R209.2 R210.1 R211.1 R212.1 R213.1 R214.1 R215.1 R216.1 R217.1 R218.1 R219.1 R220.1 R221.1 R222.1 R223.1 R224.1 R225.1 R226.1 R227.1 R228.1 R229.1 R230.1 R231.1 R232.1 R233.1 R234.1 R235.1 R236.1 R237.1 R238.1 R239.1 R240.1 R241.1 R242.1 R243.1 R244.1 R245.2 R259.2 Reg201.3 U202.8 U202.15 U203.8 U203.15
GND301: Batt301.2 C301.1 C302.1 C303.1 C304.1 C305.1 C306.1 C307.1 C308.1 C309.1 C310.1 C311.1 C312.1 C313.1 C314.1 C315.1 C316.1 C317.1 C318.1 C319.1 C320.1 C321.1 C322.1 C323.1 ISP301.6 MOS301.3 MOS301.6 MOS302.3 MOS302.6 MOS303.3 MOS303.6 MOS304.3 MOS304.6 MOS305.3 P301.2 R313.1 R315.1 R319.1 R320.1 R321.1 R325.1 R326.1 R327.1 R331.1 R332.1 R333.1 REG301.3 REG301.6 REG302.3 REG302.6 REG303.3 REG303.6 REG304.3 REG304.6 S301.2 U301.3 U301.5 U301.21 Valve301.2 Valve302.2 Valve303.2
HEADLIGHT_201: I202.2 U201.22
HEADLIGHT_201A: I204.2 R259.1 S203.2 TP205.1
HEADLIGHTENABLE_101: I101.4 U101.12
HEADLIGHTENABLE_101A: I105.4 MOS108.2 R111.2 TP104.1
HVDC_201: C213.2 C216.2 C220.2 D201.1 R264.2 R273.1 TP217.1
ISENSE_201: MOS204.3 R261.1 TP220.1 U206.3
KEY_201: R252.1 S202.2 U201.12
MISO101: ISP101.1 U101.16
MISO201: ISP201.1 U201.16
MISO301: ISP301.1 U301.16
MOSI101: ISP101.4 U101.15
MOSI201: ISP201.4 U201.15
MOSI301: ISP301.4 U301.15
NetBTValve401_1: BTValve401.1 Valve401.1
NetBTValve401_2: BTValve401.2 Valve401.2
NetC107_2: C107.2 U101.20
NetC118_2: C118.2 PWR101.8
NetC119_2: C119.2 R131.1
NetC120_2: C120.2 PWR102.8
NetC121_2: C121.2 R133.1
NetC201_2: C201.2 C202.2 Reg201.2
NetC208_2: C208.2 U201.20
NetC211_1: C211.1 T201.3
NetC211_2: C211.2 MOS204.1 T201.1
NetC217_1: C217.1 EL201.2 MOS205.1
NetC217_2: C217.2 L203.1 R273.2
NetC229_1: C229.1 U206.1
NetC230_2: C230.2 U204.5
NetC231_2: C231.2 U205.5
NetC232_2: C232.2 R271.2 U204.2 U204.6
NetC233_2: C233.2 R272.2 U205.2 U205.6
NetC322_2: C322.2 U301.20
NetD101_3: L102.2 PWR101.5
NetD102_3: L103.2 PWR102.5
NetEL201_1: EL201.1 L203.2
NetL101_1: L101.1 U101.18
NetL201_1: L201.1 U201.18
NetL202_1: L202.1 R260.1
NetL202_2: L202.2 MOS204.2 TP216.1
NetL204_1: L204.1 R262.1
NetL204_2: L204.2 MOS205.2
NetL301_1: L301.1 U301.18
NetLED109_2: LED109.2 LED110.2 R102.2
NetLED201_1: LED201.1 R211.2
NetLED201_2: LED201.2 R212.2
NetLED201_3: LED201.3 R213.2
NetLED202_1: LED202.1 R214.2
NetLED202_2: LED202.2 R215.2
NetLED202_3: LED202.3 R216.2
NetLED203_1: LED203.1 R217.2
NetLED203_2: LED203.2 R218.2
NetLED203_3: LED203.3 R219.2
NetLED204_1: LED204.1 R220.2
NetLED204_2: LED204.2 R221.2
NetLED204_3: LED204.3 R222.2
NetLED205_1: LED205.1 R223.2
NetLED205_2: LED205.2 R224.2
NetLED205_3: LED205.3 R225.2
NetLED206_1: LED206.1 R226.2
NetLED206_2: LED206.2 R227.2
NetLED206_3: LED206.3 R228.2
NetLED207_1: LED207.1 R229.2
NetLED207_2: LED207.2 R230.2
NetLED207_3: LED207.3 R231.2
NetLED208_1: LED208.1 R232.2
NetLED208_2: LED208.2 R233.2
NetLED208_3: LED208.3 R234.2
NetLED209_1: LED209.1 R235.2
NetLED209_2: LED209.2 R236.2
NetLED209_3: LED209.3 R237.2
NetLED210_1: LED210.1 R238.2
NetLED210_2: LED210.2 R239.2
NetLED210_3: LED210.3 R240.2
NetLED211_1: LED211.1 R241.2
NetLED211_2: LED211.2 R242.2
NetLED211_3: LED211.3 R243.2
NetLED401_0: Valve401.3
NetLED401_1: LED401.1 Valve401.4
NetLED401_2: LED401.2 Valve401.5
NetLED401_3: LED401.3 Valve401.6
NetLED402_0: Valve402.3
NetLED402_1: LED402.1 Valve402.4
NetLED402_2: LED402.2 Valve402.5
NetLED402_3: LED402.3 Valve402.6
NetMOS101_1: MOS101.1 R103.2
NetMOS101_4: MOS101.4 R104.2
NetMOS102_1: MOS102.1 MOS102.4 R101.2
NetMOS103_1: MOS103.1 R106.2
NetMOS103_4: MOS103.4 R116.2
NetMOS104_1: MOS104.1 R107.2
NetMOS104_4: MOS104.4 R105.2
NetMOS105_1: MOS105.1 R118.2
NetMOS105_4: MOS105.4 R115.2
NetMOS106_1: MOS106.1 R124.2
NetMOS106_4: MOS106.4 R122.2
NetMOS107_1: MOS107.1 R123.2
NetMOS108_1: MOS108.1 R102.1
NetMOS201_1: MOS201.1 R246.2
NetMOS201_4: MOS201.4 R247.2
NetMOS202_1: MOS202.1 R248.2
NetMOS202_4: MOS202.4 R253.2
NetMOS203_1: MOS203.1 R254.2
NetMOS203_4: MOS203.4 R255.2
NetMOS301_1: MOS301.1 R316.2
NetMOS301_4: MOS301.4 R317.2
NetMOS302_1: MOS302.1 R318.2
NetMOS302_4: MOS302.4 R322.2
NetMOS303_1: MOS303.1 R323.2
NetMOS303_4: MOS303.4 R324.2
NetMOS304_1: MOS304.1 R328.2
NetMOS304_4: MOS304.4 R329.2
NetMOS305_1: MOS305.1 R330.2
NetMOS?_1: MOS?.1 TP223.1 U206.4 U207.2
NetPWR101_1: PWR101.1 R131.2
NetPWR101_2: PWR101.2 R129.1 R132.2
NetPWR102_1: PWR102.1 R133.2
NetPWR102_2: PWR102.2 R130.1 R134.2
NetR265_1: R265.1 R266.1 U206.8
NetR267_1: R267.1 U204.4
NetR267_2: R267.2 R271.1 U204.7
NetR268_2: R268.2 R272.1 U205.7
NetR301_2: R301.2 REG301.4
NetR306_2: R306.2 REG302.4
NetR312_2: R312.2 REG303.4
NetR314_2: R314.2 R315.2 REG304.5
NetU202_4: U202.4 U203.2
NetU202_7: U202.7 U203.5
NetU202_9: U202.9 U203.11
NetU202_12: U202.12 U203.14
NetValve101_2: Valve101.2 Valve102.1
NetValve102_2: Valve102.2 Valve103.1
OPT_RX_101: OptRx101.1 TP111.1 U101.30
OPT_RX_201: Opt_Rx_201.1 TP212.1 U201.30
OPT_TX_101: OptTx101.1 TP115.1 U101.31
OPT_TX_201: Opt_Tx_201.1 TP218.1 U201.31
PGATE_201: R260.2 U206.6
R_CONTROL_101: LED101.3 LED102.3 LED104.3 LED105.3 LED106.3 LED107.3 LED108.3 R101.1
R_PWM_101: I101.1 MOS102.2 R117.1 U101.32
R_PWM_101A: I105.1 MOS102.5 R110.2 TP103.1
RESET101: ISP101.5 R128.1 S101.1 U101.29
RESET201: ISP201.5 U201.29
RESET301: ISP301.5 R334.1 S301.1 U301.29
SCK101: ISP101.3 U101.17
SCK201: ISP201.3 U201.17
SCK301: ISP301.3 U301.17
SMPSBENABLE_101: I102.3 U101.14
SMPSBENABLE_101B: I106.3 PWR102.3 TP119.1
SW_201: R201.1 S201.1 U202.2
SW_202: R203.1 S201.2 U202.5
SW_203: R205.1 S201.3 U202.11
SW_204: R207.1 S201.5
SW_205: R209.1 S201.6 U202.3
SW_206: R244.2 S201.12 U202.6
SW_207: R245.1 S201.13
SW_208: R210.2 S201.11 U202.13
SW_209: R208.2 S201.10 U203.3
SW_210: R206.2 S201.9 U203.6
SW_211: R204.2 S201.8 U203.10
SW_212: R202.2 S201.7 U203.13
VALVE+301: C303.2 C304.2 R301.1 REG301.5 TP301.1 U301.27 Valve301.1
VALVE+302: C307.2 C308.2 R306.1 REG302.5 TP303.1 U301.28 Valve302.1
VALVE+303: C311.2 C312.2 R312.1 REG303.5 TP305.1 U301.19 Valve303.1
VALVE_B_101: I103.3 R106.1
VALVE_B_101B: I107.3
VALVE_B_102: I103.6 R116.1
VALVE_B_102B: I107.6 Valve102.6
VALVE_B_103: R123.1
VALVE_B_103B: Valve103.6
VALVE_B_201: R247.1
VALVE_B_202: R254.1 Valve202.6
VALVE_B_301: R317.1
VALVE_B_302: R323.1
VALVE_B_303: R329.1
"VALVE_B__PWM 103": U101.11
VALVE_B_PWM_101: MOS103.2 R113.2 TP106.1 U101.25
VALVE_B_PWM_102: MOS103.5 R120.2 TP109.1 U101.28
VALVE_B_PWM_103: MOS107.2 R126.2 TP113.1
VALVE_B_PWM_201: MOS201.5 R250.2 TP210.1 U201.2
VALVE_B_PWM_202: MOS203.2 R257.2 TP214.1 U201.11
VALVE_B_PWM_301: MOS301.5 R320.2 TP311.1 U301.2
VALVE_B_PWM_302: MOS303.2 R326.2 TP314.1 U301.11
VALVE_B_PWM_303: MOS304.5 R332.2 TP317.1 U301.14
VALVE_G_101: I103.2 R105.1
VALVE_G_101B: I107.2
VALVE_G_102: I103.5 R115.1
VALVE_G_102B: I107.5 Valve102.5
VALVE_G_103: R122.1
VALVE_G_103B: Valve103.5
VALVE_G_201: R246.1
VALVE_G_202: R253.1 Valve202.5
VALVE_G_301: R316.1
VALVE_G_302: R322.1
VALVE_G_303: R328.1
VALVE_G_PWM_101: MOS104.5 R112.2 TP105.1 U101.24
VALVE_G_PWM_102: MOS105.5 R119.2 TP108.1 U101.27
VALVE_G_PWM_103: MOS106.5 R125.2 TP112.1 U101.10
VALVE_G_PWM_201: MOS201.2 R249.2 TP209.1 U201.1
VALVE_G_PWM_202: MOS202.5 R256.2 TP213.1 U201.10
VALVE_G_PWM_301: MOS301.2 R319.2 TP310.1 U301.1
VALVE_G_PWM_302: MOS302.5 R325.2 TP313.1 U301.10
VALVE_G_PWM_303: MOS304.2 R331.2 TP316.1 U301.13
VALVE_R_101: I103.1 R107.1
VALVE_R_101B: I107.1
VALVE_R_102: I103.4 R118.1
VALVE_R_102B: I107.4 Valve102.4
VALVE_R_103: R124.1
VALVE_R_103B: Valve103.4
VALVE_R_201: R248.1
VALVE_R_202: R255.1 Valve202.4
VALVE_R_301: R318.1
VALVE_R_302: R324.1
VALVE_R_303: R330.1
VALVE_R_PWM_101: MOS104.2 R114.2 TP107.1 U101.23
VALVE_R_PWM_102: MOS105.2 R121.2 TP110.1 U101.26
VALVE_R_PWM_103: MOS106.2 R127.2 TP114.1 U101.9
VALVE_R_PWM_201: MOS202.2 R251.2 TP211.1 U201.32
VALVE_R_PWM_202: MOS203.5 R258.2 TP215.1 U201.9
VALVE_R_PWM_301: MOS302.2 R321.2 TP312.1 U301.32
VALVE_R_PWM_302: MOS303.5 R327.2 TP315.1 U301.9
VALVE_R_PWM_303: MOS305.2 R333.2 TP318.1 U301.12
VALVEBANK_101: C110.2 C111.2 C114.2 C115.2 L102.1 L103.1 PWR101.3 PWR101.6 PWR101.7 PWR102.6 PWR102.7 TP117.1 Valve101.1
VALVEEN301: REG301.1 TP302.1 U301.23
VALVEEN302: REG302.1 TP304.1 U301.24
VALVEEN303: REG303.1 TP306.1 U301.25
VBATT201A: I204.3 Reg201.1
VCC101: C102.2 C104.2 C105.2 C106.2 C109.2 I102.4 I102.6 ISP101.2 L101.2 OptRx101.3 OptTx101.2 R128.2 U101.4 U101.6
VCC101A: LED109.1 LED110.1
VCC101B: C112.2 C113.2 C116.2 C117.2 D101.1 D102.1 I106.4 I106.6 R129.2 R130.2 TP116.1 TP118.1 Valve101.3 Valve102.3 Valve103.3
VCC102: I101.6
VCC102A: I105.6
VCC201: C205.2 C206.2 C207.2 C210.2 C214.2 C219.1 C221.1 C222.1 C226.2 C227.2 C228.2 C234.1 C235.1 C236.1 C238.1 I201.1 ISP201.2 L201.2 Opt_Rx_201.3 Opt_Tx_201.2 R266.2 R268.1 R269.2 R270.2 Reg202.2 S202.1 T201.2 U201.4 U201.6 U204.8 U205.4 U205.8 U206.7 U207.14 Valve201.3 Valve202.3
VCC201A: C212.1 C215.2 I203.1 S201.14 S203.1 U202.16 U203.16
VCC301: C301.2 C302.2 C305.2 C306.2 C309.2 C310.2 C313.2 C314.2 C319.2 C320.2 C321.2 ISP301.2 L301.2 P301.1 R334.2 REG301.2 REG302.2 REG303.2 REG304.2 U301.4 U301.6 Valve301.3 Valve302.3 Valve303.3
VFB_201: C229.2 R263.2 R264.1 TP222.1 U206.2
XTAL101: C101.2 U101.7 Y101.1
XTAL102: C103.2 U101.8 Y101.2
XTAL201: C203.2 U201.7 Y201.1
XTAL202: C204.2 U201.8 Y201.2
XTAL301: C317.2 U301.7 Y301.1
XTAL302: C318.2 U301.8 Y301.2
pads on no net: C108.2 C209.2 C218.1 C237.1 C323.2 D101.2 D102.2 D201.2 I102.2 I104.1 I104.2 I104.3 I104.4 I104.5 I104.6 I106.2 I108.1 I108.2 I108.3 I108.4 I108.5 I108.6 I201.6 I203.6 ISP101.0 ISP101.7 ISP201.0 ISP201.7 ISP301.0 ISP301.7 LED101.4 LED102.4 LED103.3 LED103.4 LED104.4 LED105.4 LED106.4 LED107.4 LED108.4 LED201.4 LED202.4 LED203.4 LED204.4 LED205.4 LED206.4 LED207.4 LED208.4 LED209.4 LED210.4 LED211.4 LED401.4 LED402.4 MOS107.4 MOS107.5 MOS107.6 MOS108.4 MOS108.5 MOS108.6 MOS305.4 MOS305.5 MOS305.6 MOS?.4 MOS?.5 MOS?.6 Reg201.4 Reg201.6 Reg202.4 Reg202.6 T201.0 T201.4 T201.5 T201.7 U101.13 U101.22 U202.10 U202.14 U207.3 U207.4 U207.5 U207.6 U207.8 U207.9 U207.10 U207.11 U207.12 U207.13 U301.30 U301.31 Valve101.4 Valve101.5 Valve101.6 Valve201.1 Valve201.2 Valve201.4 Valve201.5 Valve201.6 Valve202.1 Valve202.2 Valve301.4 Valve301.5 Valve301.6 Valve302.4 Valve302.5 Valve302.6 Valve303.4 Valve303.5 Valve303.6 Valve402.1 Valve402.2

## Text inside footprints (layer, text, board x,y; h text height)
BT201: Top Overlay "+" at 16072.72,7715.51 h45.28 r90
BTValve401: Top Overlay "+" at 6272.72,8975.51 h45.28 r90
Opt_Rx_201: Top Overlay "O" at 29659.13,5870.31 h31.5 r90; Top Overlay "-" at 29655.2,6031.73 h31.5 r90; Top Overlay "+" at 29655.2,6193.15 h31.5 r90
Opt_Tx_201: Top Overlay "In" at 23919.13,7550.31 h31.5 r90; Top Overlay "-" at 23927.01,7877.09 h31.5 r90; Top Overlay "+" at 23919.13,7715.67 h31.5 r90
OptRx101: Top Overlay "O" at 22109.13,8320.32 h31.5 r90; Top Overlay "-" at 22105.2,8481.73 h31.5 r90; Top Overlay "+" at 22105.2,8643.15 h31.5 r90
OptTx101: Top Overlay "In" at 17879.13,8320.32 h31.5 r90; Top Overlay "-" at 17887.01,8647.09 h31.5 r90; Top Overlay "+" at 17879.13,8485.67 h31.5 r90